# EAGLE board MAIN_BASE_2 (EAGLE 7.6.0)

Size 222.25 x 92.71 mm. Coordinates in mm from the lower left corner, seen from the top.
Outline: 222.25,90.17 222.25,2.54 arc-90 219.71,0 2.54,0 arc-90 0,2.54 0,90.17 arc-90 2.54,92.71 219.71,92.71 arc-90 222.25,90.17
Copper layers (1*16): Top 0.035mm / dielectric 1.5mm / Bottom 0.035mm
Design rules "SparkFun-2-layer-STANDARD *": minimum track width 8mil, minimum drill 20mil, track to track 10mil, track to pad 8mil, pad to pad 8mil, via to via 10mil, smd to smd 8mil, copper to edge 8mil, drill to drill 8mil, minimum pad ring 10mil, minimum via ring 10mil, stop-mask expansion 4mil, vias tented up to drill 25mil, thermal gap 10mil
Net classes: 1 8_mil: width 0.203 mm; 2 10_mil: width 0.254 mm; 3 12_mil: width 0.305 mm; 4 15_mil: width 0.381 mm; 5 20_mil: width 0.508 mm; 6 25_mil: width 0.635 mm; 7 30_mil: width 0.762 mm
Holes 3.05 mm at 5.08,87.63 217.17,87.63 217.17,5.08 5.08,5.08

## Footprints (pad centres in the part's own frame; a part is rotated, then mirrored left to right if it is on the bottom)
SIMON_JUMPS_MAIN_BOARD = hole 3.048: -27.94,46.99; 27.94,46.99; 27.94,-44.45; -27.94,-44.45
NOISY_CRICKET = hole 3.048: 12.7,8.89; 12.7,-8.89

## Placement (x,y rotation side)
E$2  [SIMON_JUMPS_MAIN_BOARD]  165.1,45.72 270 top
E$3  [NOISY_CRICKET]  20.32,46.99 270 top
E$4  [TSUNAMI]  111.76,12.7 90 top

## Library data of the parts
E$2 E$3 = simon_jumps
E$4 = audioflyer